# EAGLE board apollobvm_pcb (EAGLE 9.6.0)

Size 160 x 100 mm. Coordinates in mm from the lower left corner, seen from the top.
Outline: 0,0 160,0 160,100 0,100 0,0
Copper layers (1*16): Top 0.035mm / dielectric 1.5mm / Bottom 0.035mm
Design rules "default": minimum track width 6mil, minimum drill 0.35mm, track to track 6mil, track to pad 6mil, pad to pad 6mil, via to via 6mil, smd to smd 6mil, copper to edge 40mil, drill to drill 6mil, minimum pad ring 10mil, minimum via ring 8mil, stop-mask expansion 4mil, vias tented up to drill 0mil, thermal gap 10mil

## Footprints (pad centres in the part's own frame; a part is rotated, then mirrored left to right if it is on the bottom)
0603 = smd 1.1 x 1: 1 -0.85,0; 2 0.85,0
DIL28-3 = drill 0.813 long: 1 -16.51,-3.81; 2 -13.97,-3.81; 3 -11.43,-3.81; 4 -8.89,-3.81; 5 -6.35,-3.81; 6 -3.81,-3.81; 7 -1.27,-3.81; 8 1.27,-3.81; 9 3.81,-3.81; 10 6.35,-3.81; 11 8.89,-3.81; 12 11.43,-3.81; 13 13.97,-3.81; 14 16.51,-3.81; 15 16.51,3.81; 16 13.97,3.81; 17 11.43,3.81; 18 8.89,3.81; 19 6.35,3.81; 20 3.81,3.81; 21 1.27,3.81; 22 -1.27,3.81; 23 -3.81,3.81; 24 -6.35,3.81; 25 -8.89,3.81; 26 -11.43,3.81; 27 -13.97,3.81; 28 -16.51,3.81
QS = drill 0.61 long: 1 -2.54,0; 2 2.54,0
MA03-1 = drill 1.016 long: 1 -2.54,0; 2 0,0; 3 2.54,0
NCP1117 = smd 1.5 x 2: GND -2.3,0; INPUT 2.3,0; OUTPUT 0,0 | smd 3.8 x 2: TAB 0,6.3
22-23-2031 = drill 1 long: 1 -2.54,0; 2 0,0; 3 2.54,0
22-23-2021 = drill 1 long: 1 -1.27,0; 2 1.27,0
22-23-2051 = drill 1 long: 1 -5.08,0; 2 -2.54,0; 3 0,0; 4 2.54,0; 5 5.08,0

## Placement (x,y rotation side)
C1  22pF  [0603]  -26.67,36.83 0 top  (outside the outline)
C2  22pF  [0603]  -30.48,36.83 0 top  (outside the outline)
C3  22pF  [0603]  -34.29,36.83 0 top  (outside the outline)
C4  22pF  [0603]  -38.1,36.83 0 top  (outside the outline)
C5  10uF  [0603]  -41.91,36.83 0 top  (outside the outline)
C6  10uF  [0603]  -45.72,36.83 0 top  (outside the outline)
C7  4.7uF  [0603]  -82,-24 0 top  (outside the outline)
IC1  ATMEGA328-20P  [DIL28-3]  47.25,41.35 0 top
IC2  ATMEGA328-20P  [DIL28-3]  47.25,83.78 0 top
Q1  [QS]  -41.91,26.67 0 top  (outside the outline)
Q2  [QS]  -19.05,36.83 0 top  (outside the outline)
R1  10k  [0603]  -15.24,43.18 0 top  (outside the outline)
R2  10k  [0603]  -19.05,43.18 0 top  (outside the outline)
R3  47k  [0603]  -82,-20 0 top  (outside the outline)
SV1  [MA03-1]  14.6,24.87 180 top
U$1  NCP1117  [NCP1117]  -31.75,25.4 0 top  (outside the outline)
X1  22-23-2031  [22-23-2031]  86,77 0 top
X2  22-23-2031  [22-23-2031]  86,52 0 top
X3  22-23-2021  [22-23-2021]  -74,-6 0 top  (outside the outline)
X4  22-23-2051  [22-23-2051]  6,-12 0 top  (outside the outline)
X5  22-23-2021  [22-23-2021]  -81,-12 0 top  (outside the outline)

## Library data of the parts
C1-C4 = SparkFun-Capacitors; PROD_ID: CAP-07876
C5 C6 = SparkFun-Capacitors; PROD_ID: CAP-11015
C7 = SparkFun-Capacitors; PROD_ID: CAP-08280
IC1 IC2 = atmega328
Q1 Q2 = special
R1 R2 = SparkFun-Resistors; PROD_ID: RES-00824
R3 = SparkFun-Resistors; PROD_ID: RES-07871
SV1 = con-lstb; OC_FARNELL: unknown; OC_NEWARK: unknown
U$1 = apollobvm_pcb
X1 X2 = con-molex; MF: MOLEX; MPN: 22-23-2031; OC_FARNELL: 1462950; OC_NEWARK: 30C0862
X3 X5 = con-molex; MF: MOLEX; MPN: 22-23-2021; OC_FARNELL: 1462926; OC_NEWARK: 25C3832
X4 = con-molex; MF: MOLEX; MPN: 22-23-2051; OC_FARNELL: 1462952; OC_NEWARK: 38C9178

## Nets
+5V: C5.1 C7.1 IC1.7 IC1.20 IC2.7 IC2.20 R1.1 R2.1 SV1.3 U$1.OUTPUT X4.4 X5.2
GND: C1.2 C2.2 C3.2 C4.2 C5.2 C6.1 C7.2 IC1.8 IC1.22 IC2.8 IC2.22 R3.1 SV1.2 U$1.GND X1.1 X2.1 X3.1 X4.5
N$1: IC1.1 R1.2
N$2: IC2.1 R2.2
N$3: C3.1 IC2.9 Q2.1
N$4: C4.1 IC2.10 Q2.2
N$5: C1.1 IC1.9 Q1.1
N$6: C2.1 IC1.10 Q1.2
N$7: IC2.15 X1.3 X2.3
N$8: IC1.5 SV1.1
N$9: IC1.13 X4.3
N$10: IC1.11 X4.2
N$11: IC1.27 IC2.27
N$12: IC1.12 X4.1
N$13: IC1.28 IC2.28
N$14: IC1.17 R3.2 X5.1
VCC: C6.2 U$1.INPUT X1.2 X2.2 X3.2

## Tracks (layer width: path | path; a pad name or v marks a point on that pad's centre or on a via)
+5V  (11 unrouted)
GND  (17 unrouted)
N$1  (1 unrouted)
N$2  (1 unrouted)
N$3  (2 unrouted)
N$4  (2 unrouted)
N$5  (2 unrouted)
N$6  (2 unrouted)
N$7  (2 unrouted)
N$8  (1 unrouted)
N$9  (1 unrouted)
N$10  (1 unrouted)
N$11  (1 unrouted)
N$12  (1 unrouted)
N$13  (1 unrouted)
N$14  (2 unrouted)
VCC  (4 unrouted)